# Altium PCB Smart_Gateway_Rev1.0.PcbDoc
Units mm, origin at the board's own origin, x right, y up, seen from the top; angles counter-clockwise.
Board outline 55 x 55 mm, 2 copper layers (Top Layer, Bottom Layer), stack 1.58 mm thick; 46 components, 48 nets, 224 pads, 110 vias.
Unrouted connection lines stored in the file: 43.
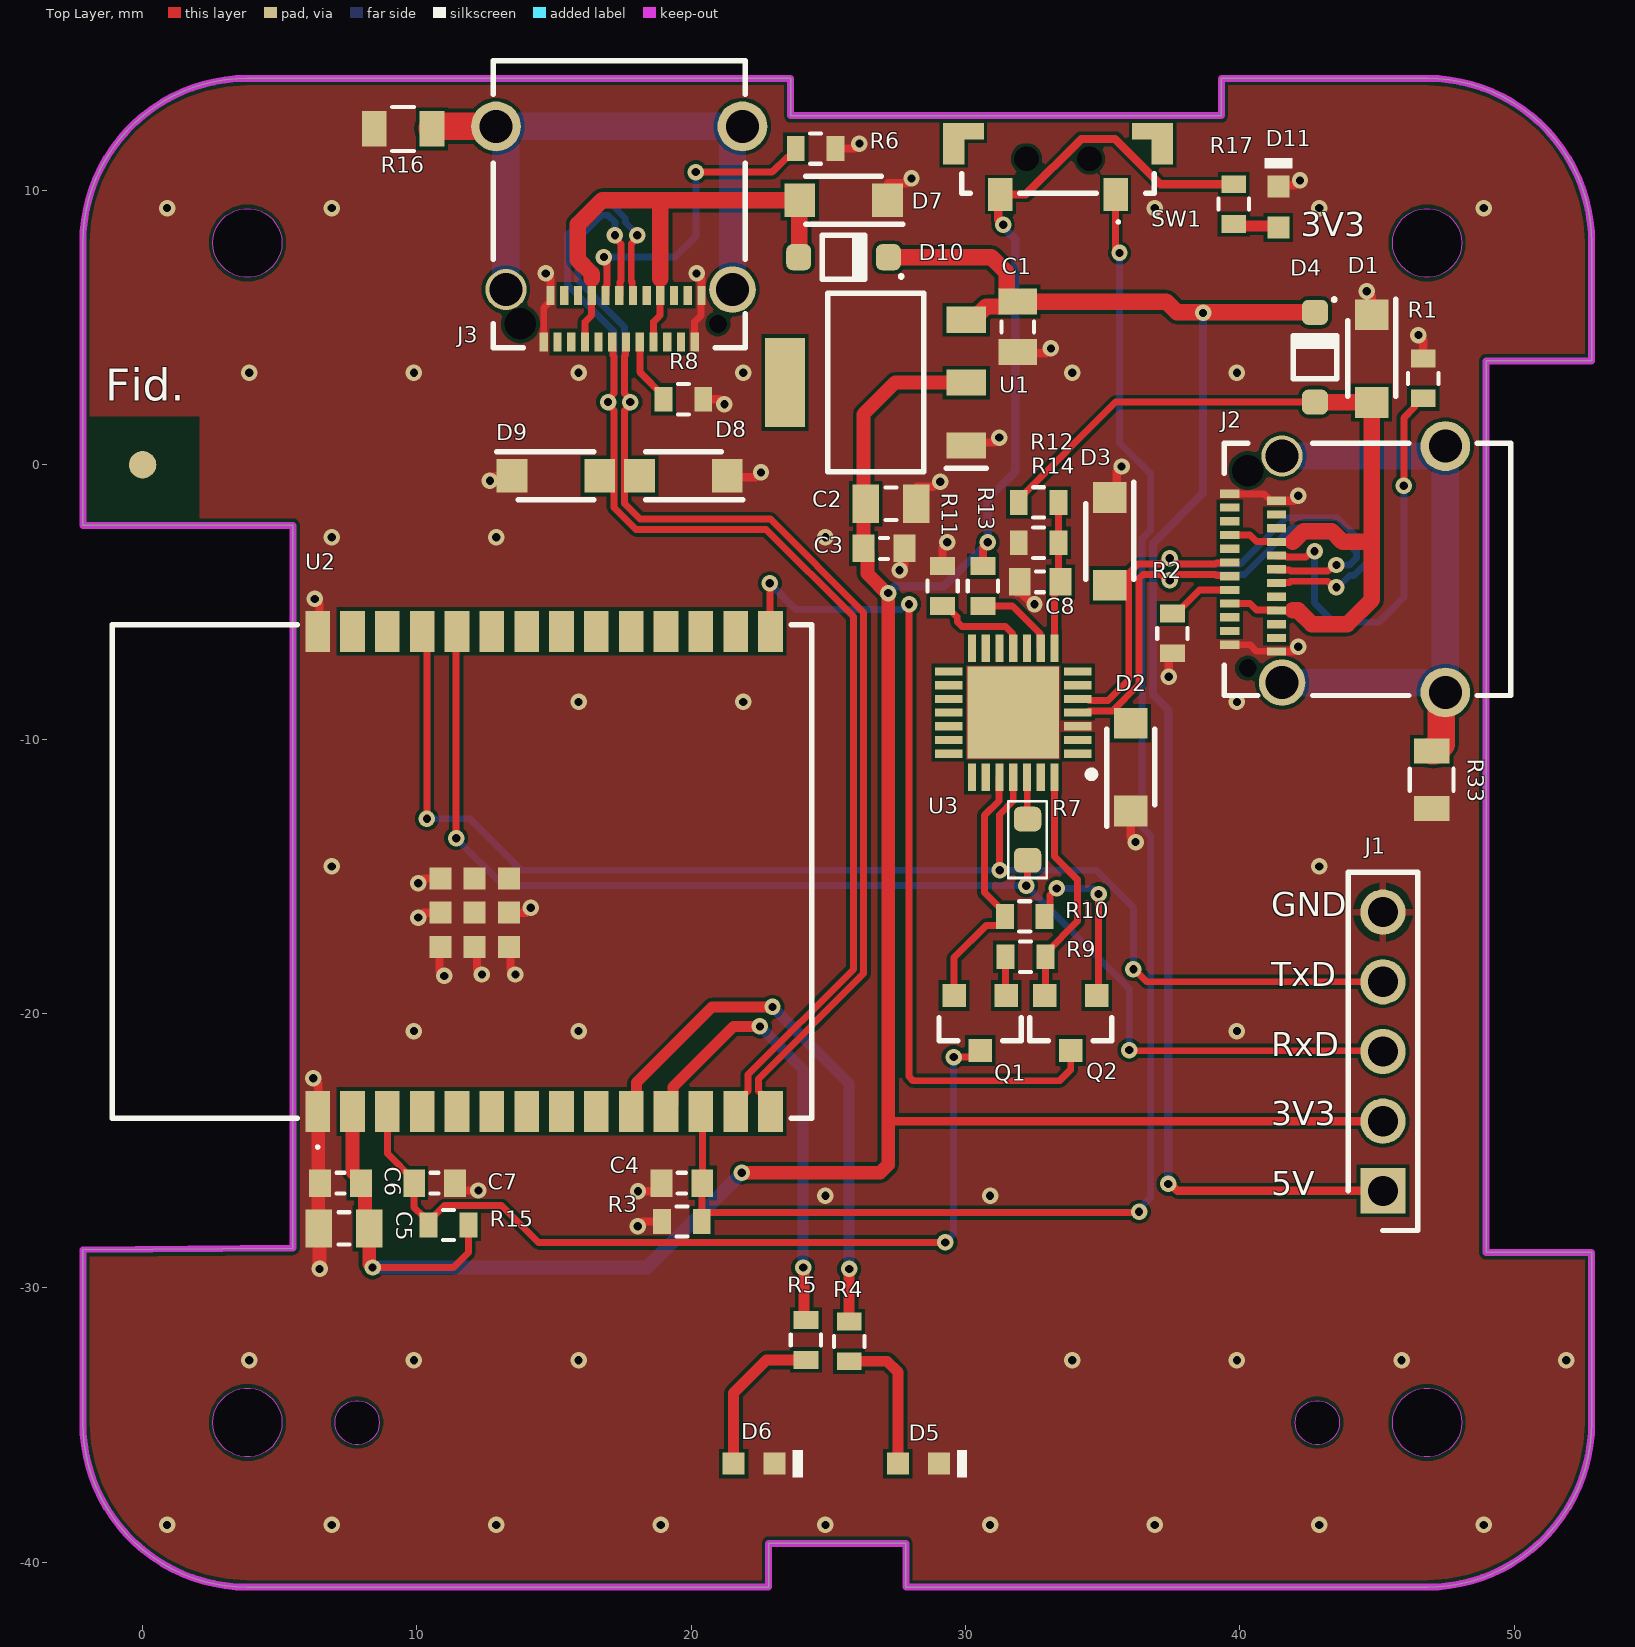
[diagram p0: Top Layer view]
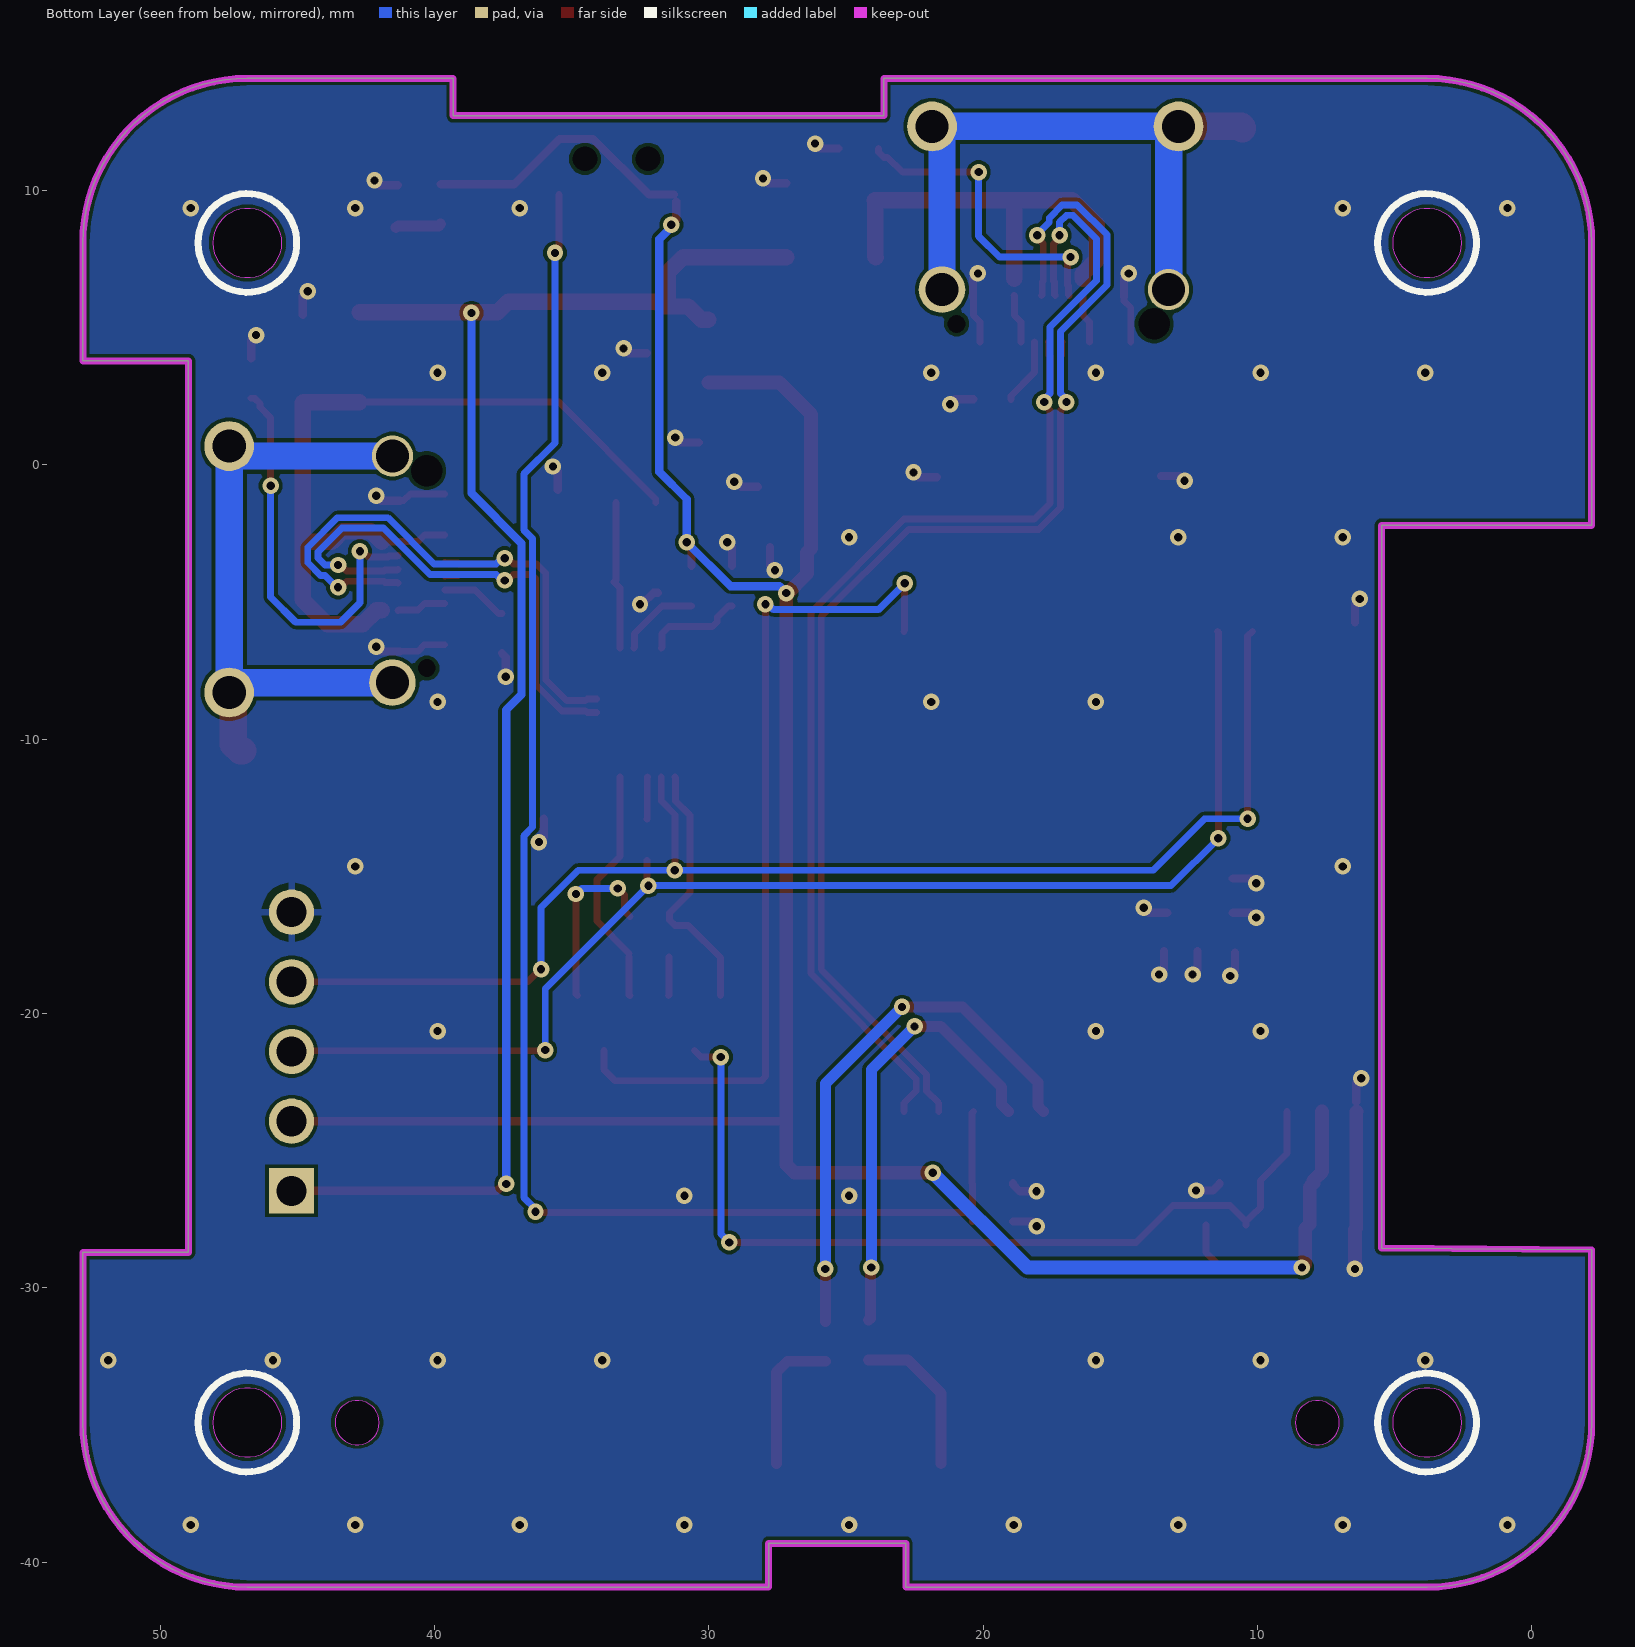
[diagram p1: Bottom Layer view, seen from below]
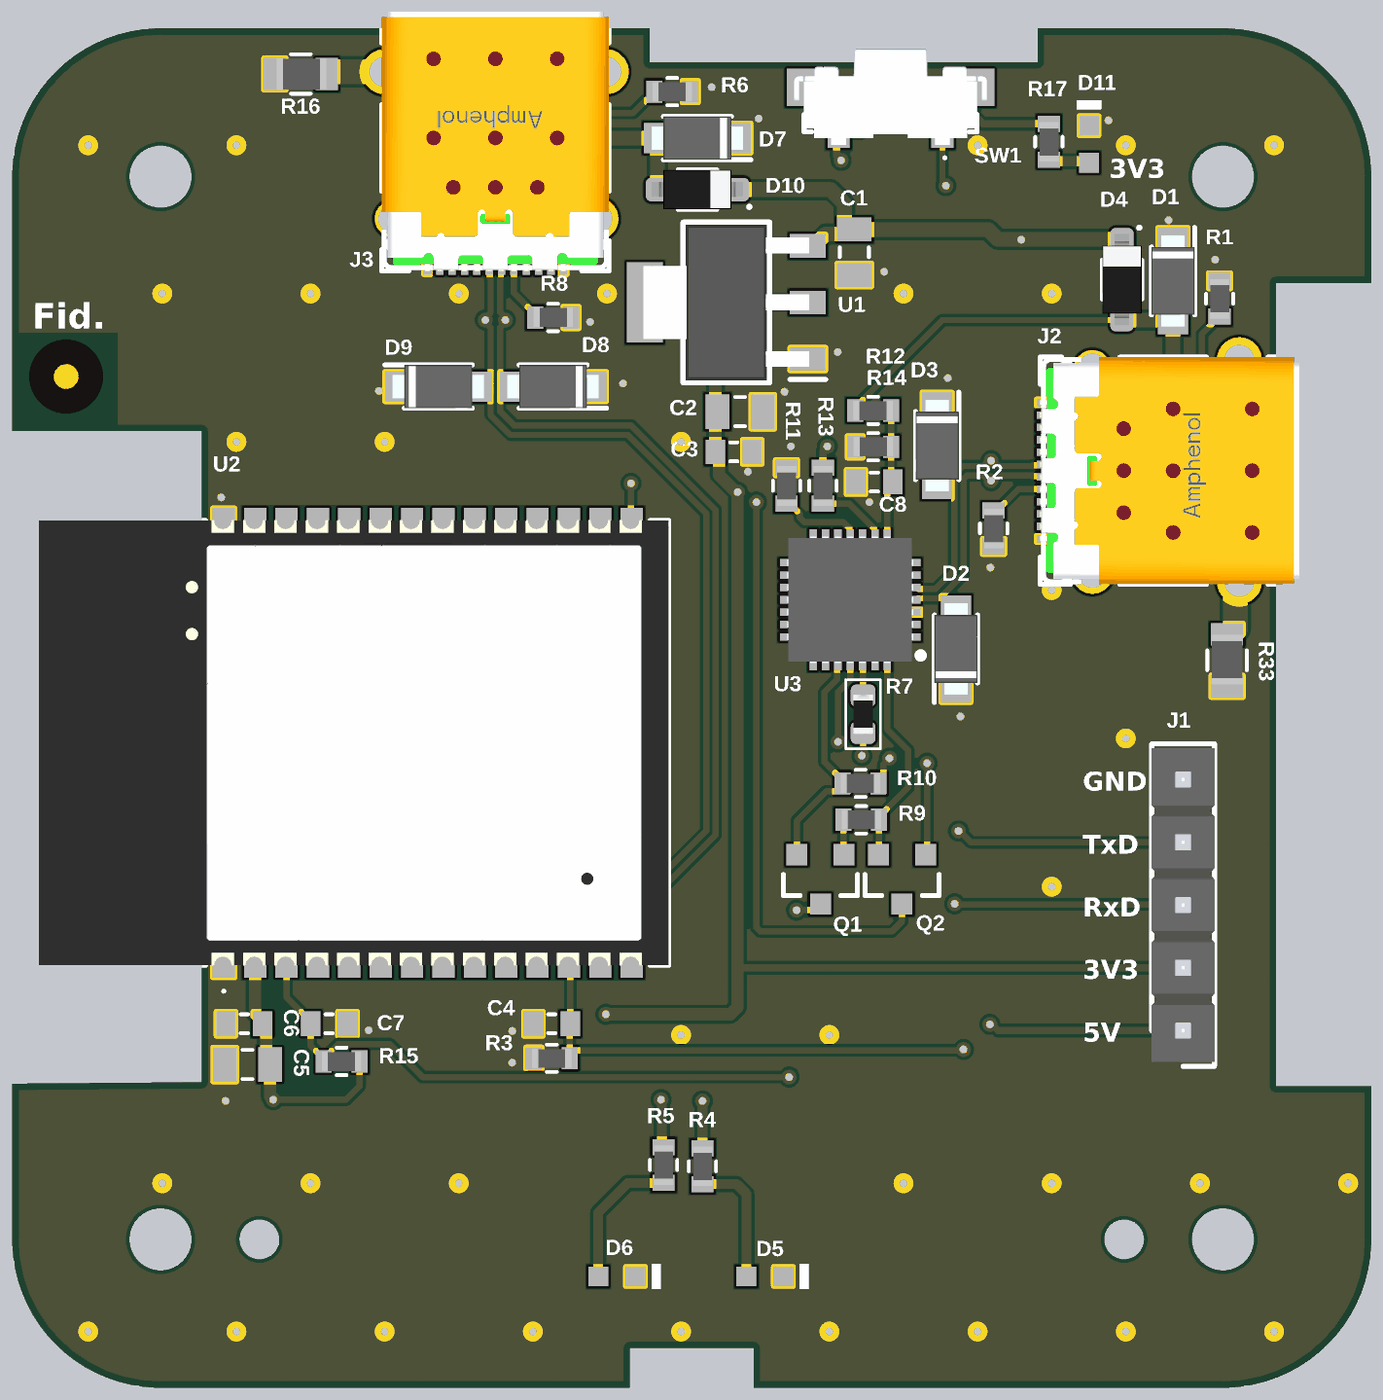
[diagram p2: 3D render of the assembled board from above, using the file's embedded part models]

## Layer stack, top to bottom
Top Solder: solder mask 0.0102, Solder Resist, Dk 3.5
Top Layer: signal copper 0.0356
Dielectric 1: dielectric 1.5086, FR-4, Dk 4.8
Bottom Layer: signal copper 0.0356
Bottom Solder: solder mask 0.0102, Solder Resist, Dk 3.5

## Board outline
3.822,-40.913 cw(c3.822,-34.913) -2.178,-34.913 -2.178,-28.613 5.482,-28.553 5.482,-2.213 -2.178,-2.213 -2.178,8.087 cw(c3.822,8.087) 3.822,14.087 23.622,14.087 23.622,12.725 39.322,12.725 39.322,14.087 46.822,14.087 cw(c46.822,8.087) 52.822,8.087 52.822,3.787 48.972,3.787 48.972,-28.713 52.822,-28.713 52.822,-34.913 cw(c46.822,-34.913) 46.822,-40.913 27.822,-40.913 27.822,-39.313 22.822,-39.313 22.822,-40.913
cut-out: 45.565,8.087 cw(c46.822,8.087) 48.079,8.087 cw(c46.822,8.087)
cut-out: 45.565,-34.913 cw(c46.822,-34.913) 48.079,-34.913 cw(c46.822,-34.913)
cut-out: 42.015,-34.913 cw(c42.822,-34.913) 43.629,-34.913 cw(c42.822,-34.913)
cut-out: 7.015,-34.913 cw(c7.822,-34.913) 8.629,-34.913 cw(c7.822,-34.913)
cut-out: 2.565,-34.913 cw(c3.822,-34.913) 5.079,-34.913 cw(c3.822,-34.913)
cut-out: 2.565,8.087 cw(c3.822,8.087) 5.079,8.087 cw(c3.822,8.087)

## Design rules (kind name [scope] priority, off if disabled: settings)
Clearance [All] p1: gap=0.127 ignorepadtopadclearanceinfootprint=TRUE
DiffPairsRouting DiffPairsRouting_USBB [InDifferentialPair('USBB_D')] p1: maxlimit=0.127 minlimit=0.127 mostfreqgap=0.127 toplayer_minwidth=0.25 toplayer_maxwidth=0.25 toplayer_prefwidth=0.25 bottomlayer_minwidth=0.25 bottomlayer_maxwidth=0.25 bottomlayer_prefwidth=0.25 impedanceprofiledriven=TRUE impedanceprofileid={7F7A424D-610C-4C87-8ACD-AF5C91837D9E} impedanceprofilevalue=100.000000 maxuncoupledlength=12.7
DiffPairsRouting DiffPairsRouting_USB [InDifferentialPair('USB_D')] p2: maxlimit=0.127 minlimit=0.127 mostfreqgap=0.127 toplayer_minwidth=0.25 toplayer_maxwidth=0.25 toplayer_prefwidth=0.25 bottomlayer_minwidth=0.25 bottomlayer_maxwidth=0.25 bottomlayer_prefwidth=0.25 impedanceprofiledriven=TRUE impedanceprofileid={7F7A424D-610C-4C87-8ACD-AF5C91837D9E} impedanceprofilevalue=100.000000 maxuncoupledlength=12.7
DiffPairsRouting [All] p3: maxlimit=0.254 minlimit=0.254 mostfreqgap=0.254 toplayer_minwidth=0.2 toplayer_maxwidth=0.6 toplayer_prefwidth=0.381 bottomlayer_minwidth=0.2 bottomlayer_maxwidth=0.6 bottomlayer_prefwidth=0.381 maxuncoupledlength=12.7
HoleToHoleClearance [All] p1: gap=0.127 allowstackedmicrovias=TRUE
MaxMinImpedance "Schematic Impedance Constraint_2" [InDifferentialPairClass('USBB')] p1: minimum=98.00 maximum=102.0
MinimumSolderMaskSliver [All] p1: minsoldermaskwidth=0
PolygonConnect [All] p1: thpad.connectstyle=Relief thpad.reliefconductorwidth=0.254 thpad.reliefentries=4 thpad.polygonreliefangle="90 Angle" thpad.airgapwidth=0.254 smdpad.connectstyle=Direct smdpad.reliefconductorwidth=0.254 smdpad.reliefentries=4 smdpad.polygonreliefangle="90 Angle" smdpad.airgapwidth=0.254 via.connectstyle=Direct via.reliefconductorwidth=0.254 via.reliefentries=4 via.polygonreliefangle="90 Angle" via.airgapwidth=0.254
RoutingVias [All] p1: holewidth=0.711 width=1.27 viastyle="Through Hole" minholewidth=0.711 minwidth=1.27 maxholewidth=0.711 maxwidth=1.27
SilkToSilkClearance [All] p1: silktosilkclearance=0.1
SilkToSolderMaskClearance [IsPad] p1: minsilkscreentomaskgap=0 clearancetoexposedcopper=TRUE
SolderMaskExpansion [All] p1: expansion=0.102 istentingtop=FALSE
SupplyNets "Schematic Supply Nets_6" [InNet('3V3')] p1: voltage=0.000
SupplyNets "Schematic Supply Nets_5" [InNet('EARTH')] p2: voltage=0.000
SupplyNets "Schematic Supply Nets_4" [InNet('GND')] p3: voltage=0.000
SupplyNets "Schematic Supply Nets_3" [InNet('5V')] p4: voltage=0.000
SupplyNets "Schematic Supply Nets_2" [InNet('EARTH2')] p5: voltage=0.000
SupplyNets "Schematic Supply Nets_1" [InNet('VBUSA')] p6: voltage=0.000
SupplyNets "Schematic Supply Nets" [InNet('VBUSB')] p7: voltage=0.000
Width [All] p1: maxlimit=3 minlimit=0.2 preferedwidth=0.254 minimp=50.000000 maximp=50.000000 favimp=50.000000
25 further rules are at their usual default settings.

## Classes and differential pairs
differential pair class USBB: USBB_D
differential pair class USBA: USB_D
differential pair USBB_D: +USBB_D_P -USBB_D_N
differential pair USB_D: +USB_D_P -USB_D_N

## Components (designator, comment, footprint, x,y, rotation, side; value= is the part's Value field where it differs from the comment)
C1 "CAP" CAP_0805 31.902,5.029 r0 top value=10uF
C2 "CAP" CAP_0805 27.28,-1.422 r90 top value=10uF
C3 "CAP" CAP_0603 27.026,-3.048 r90 top value=100nF
C4 "CAP" CAP_0603 19.66,-26.187 r270 top value=100nF
C5 "CAP" CAP_0805 7.341,-27.838 r270 top value=10uF
C6 "CAP" CAP_0603 7.214,-26.187 r270 top value=100nF
C7 "CL10A105KA8NNNC" CAP_0603 10.643,-26.187 r90 top value=1uF
C8 "CL10A105KA8NNNC" CAP_0603 32.715,-4.267 r270 top value=1uF
D1 "ATV02W5V0B-HF" SODFL3718X130N 44.802,3.869 r270 top
D2 "ATV02W5V0B-HF" SODFL3718X130N 36.017,-11.024 r90 top
D3 "ATV02W5V0B-HF" SODFL3718X130N 35.255,-2.794 r270 top
D4 "PMEG4010EGWJ" SOD-123 42.737,3.921 r270 top value="40V 1A"
D5 "PSC-1608U52GC-G4" LED_0603_GRN 28.282,-36.412 r180 top locked value=GREEN
D6 "PSC-1608U52GC-G4" LED_0603_GRN 22.292,-36.412 r180 top locked value=GREEN
D7 "ATV02W5V0B-HF" SODFL3718X130N 25.552,9.649 r180 top
D8 "ATV02W5V0B-HF" SODFL3718X130N 19.71,-0.406 r180 top
D9 "ATV02W5V0B-HF" SODFL3718X130N 15.062,-0.406 r0 top
D10 "PMEG4010EGWJ" SOD-123 25.552,7.566 r180 top value="40V 1A"
D11 "PSC-1608U52GC-G4" LED_0603_GRN 41.402,9.398 r270 top value=GREEN
J1 "M20-9990546" HDRV5W64P0X254_1X5_1270X254X864P 45.212,-26.467 r90 top
J2 "12401598E4#2A" 12401598E42A 44.653,-3.81 r90 top locked
J3 "12401598E4#2A" 12401598E42A 17.374,9.5 r180 top locked
Q1 "MMBT3904-7-F" SOT23 30.531,-20.349 r180 top value="40V 0.2A"
Q2 "MMBT3904-7-F" SOT23 33.833,-20.349 r180 top value="40V 0.2A"
R1 "RES" RES_0603 46.685,3.15 r180 top value=10K
R2 "RES" RES_0603 37.541,-6.147 r180 top value=10K
R3 "RES" RES_0603 19.66,-27.584 r90 top value=10K
R4 "0603SAF3301T5E" RES_0603 25.756,-31.953 r180 top value=3.3K
R5 "0603SAF3301T5E" RES_0603 24.181,-31.902 r180 top value=3.3K
R6 "RES" RES_0603 24.536,11.528 r90 top value=10K
R7 "0603SAJ0511T5E" R0603 32.258,-13.665 r270 top value=510R
R8 "RES" RES_0603 19.71,2.388 r270 top value=10K
R9 "RES" RES_0603 32.182,-17.936 r270 top value=10K
R10 "RES" RES_0603 32.156,-16.463 r90 top value=10K
R11 "RES" RES_0603 29.159,-4.42 r180 top value=10K
R12 "0603SAF2152T5E" RES_0603 32.664,-1.372 r90 top value=21.5K
R13 "RES" RES_0603 30.632,-4.42 r180 top value=1K
R14 "RES" RES_0603 32.664,-2.845 r270 top value=47K
R15 "RES" RES_0603 11.151,-27.711 r90 top value=10K
R16 "RES" RES_0805 9.5,12.243 r90 top value=2.2M
R17 "0603SAF3301T5E" RES_0603 39.776,9.5 r180 top value=3.3K
R33 "RES" RES_0805 46.99,-11.481 r180 top value=2.2M
SW1 "TS32-7-35-BK-B-260-RA-SMT-TR" TS32735BKB160RAHSMTTR 33.369,11.376 r0 top locked
U1 "AMS1117-3.3" SOT229P700X180-4N 26.721,2.997 r180 top
U2 "ESP32-C6-WROOM-1-N4" ESP32C6WROOM1N4 11.642,-14.822 r90 top locked
U3 "CP2102N-A01-GQFN28" QFN50P500X500X80-29N-D 31.737,-9.034 r180 top

## Footprints (in the part's own frame and the unit in brackets; to place one, negate y for a bottom-side part, rotate by r counter-clockwise, add the part's x,y. Pads: shape width x height; smd on the part's side, far side on the other; paste and mask are expansions set on the pad)
12401598E42A [mm]
  rect 0.3x0.7 smd: A1(-2.75,5.025) A2(-2.25,5.025) A3(-1.75,5.025) A4(-1.25,5.025) A5(-0.75,5.025) A6(-0.25,5.025) A7(0.25,5.025) A8(0.75,5.025) A9(1.25,5.025) A10(1.75,5.025) A11(2.25,5.025) A12(2.75,5.025) B1(2.5,3.325) B2(2,3.325) B3(1.5,3.325) B4(1,3.325) B5(0.5,3.325) B6(0,3.325) B7(-0.5,3.325) B8(-1,3.325) B9(-1.5,3.325) B10(-2,3.325) B11(-2.5,3.325) B12(-3,3.325)
  round 0 hole 0.65 unplated: MH1(-3.6,4.365)
  round 0 hole 1.15 unplated: MH2(3.6,4.365)
  round 1.7 hole 1.21: S1(-4.13,3.115)
  round 1.5 hole 1.21: S2(4.13,3.115)
  round 1.815 hole 1.21: S3(-4.49,-2.835) S4(4.49,-2.835)
  silkscreen extent -4.6,-5.23 4.6,5.23, body extent -4.6,-5.25 4.6,5.23, height 3.31
CAP_0603 [mm]
  rect 1x0.79 smd: 1(0,0.745) 2(0,-0.745)
  silkscreen extent -0.38,-0.15 0.38,0.15, body extent -0.4,-0.8 0.4,0.8, height 0.8
CAP_0805 [mm]
  rect 1.4x0.96 smd: 1(0,0.92) 2(0,-0.92)
  silkscreen extent -0.59,-0.2 0.59,0.2, body extent -0.62,-1 0.63,1, height 1
ESP32C6WROOM1N4 [mm]
  rect 1.5x0.9 smd: 1(-8.75,5.26) 2(-8.75,3.99) 3(-8.75,2.72) 4(-8.75,1.45) 5(-8.75,0.18) 6(-8.75,-1.09) 7(-8.75,-2.36) 8(-8.75,-3.63) 9(-8.75,-4.9) 10(-8.75,-6.17) 11(-8.75,-7.44) 12(-8.75,-8.71) 13(-8.75,-9.98) 14(-8.75,-11.25) 15(8.75,-11.25) 16(8.75,-9.98) 17(8.75,-8.71) 18(8.75,-7.44) 19(8.75,-6.17) 20(8.75,-4.9) 21(8.75,-3.63) 22(8.75,-2.36) 23(8.75,-1.09) 24(8.75,0.18) 25(8.75,1.45) 26(8.75,2.72) 27(8.75,3.99) 28(8.75,5.26)
  rect 0.8x0.8 smd: 29(-1.505,-0.46) 30(-1.505,0.79) 31(-2.755,0.79) 32(-2.755,-0.46) 33(-2.755,-1.71) 34(-1.505,-1.71) 35(-0.255,-1.71) 36(-0.255,-0.46) 37(-0.255,0.79)
  silkscreen extent -10.1,-12.75 9,12.75, body extent -9.01,-12.75 9.01,12.75, height 3.11
HDRV5W64P0X254_1X5_1270X254X864P [mm]
  rect 1.65x1.65 hole 1.1: 1(0,0)
  round 1.65 hole 1.1: 2(2.54,0) 3(5.08,0) 4(7.62,0) 5(10.16,0)
  silkscreen extent -1.45,-1.27 11.61,1.27, body extent -1.27,-1.27 11.43,1.27, height 8.64
LED_0603_GRN [mm]
  rect 0.8x0.8 smd: 1(-0.75,0) 2(0.75,0)
  silkscreen extent -1.78,-0.51 -1.4,0.51, body extent -0.79,-0.45 0.84,0.45, height 0.8
QFN50P500X500X80-29N-D [mm]
  rect 1x0.3 smd: 1(-2.35,1.5) 2(-2.35,1) 3(-2.35,0.5) 4(-2.35,0) 5(-2.35,-0.5) 6(-2.35,-1) 7(-2.35,-1.5) 15(2.35,-1.5) 16(2.35,-1) 17(2.35,-0.5) 18(2.35,0) 19(2.35,0.5) 20(2.35,1) 21(2.35,1.5)
  rect 0.3x1 smd: 8(-1.5,-2.35) 9(-1,-2.35) 10(-0.5,-2.35) 11(0,-2.35) 12(0.5,-2.35) 13(1,-2.35) 14(1.5,-2.35) 22(1.5,2.35) 23(1,2.35) 24(0.5,2.35) 25(0,2.35) 26(-0.5,2.35) 27(-1,2.35) 28(-1.5,2.35)
  rect 3.35x3.35 smd: 29(0,0)
  silkscreen extent -2.98,2.13 -2.73,2.37, body extent -2.55,-2.55 2.55,2.55, height 0.8
R0603 [mm]
  rrect50% 0.9x1 smd: 1(-0.75,0) 2(0.75,0)
  silkscreen extent -1.4,-0.7 1.4,0.7, body extent -0.8,-0.4 0.8,0.4, height 0.45
RES_0603 [mm]
  rect 0.9x0.65 smd: 1(0,0.725) 2(0,-0.725)
  silkscreen extent -0.55,-0.2 0.55,0.2, body extent -0.4,-0.79 0.39,0.81, height 0.5
RES_0805 [mm]
  rect 1.3x0.9 smd: 1(0,1.05) 2(0,-1.05)
  silkscreen extent -0.8,-0.4 0.8,0.4, body extent -0.64,-1.03 0.63,0.98, height 0.63
SOD-123 [mm] "SOD, 2-Leads, Body 2.69x1.6mm"
  rrect50% 0.91x0.95 smd: 1(-1.635,0) 2(1.635,0)
  silkscreen extent -2.1,-0.8 0.78,0.8, body extent -1.85,-0.8 1.85,0.8, height 1.27
SODFL3718X130N [mm]
  rect 1.12x1.22 smd: 1(-1.6,0) 2(1.6,0)
  silkscreen extent -2.16,-0.87 1.38,0.87, body extent -1.85,-0.87 1.85,0.87, height 1.3
SOT23 [mm]
  rect 0.85x0.85 smd: 1(-0.95,-1) 2(0.95,-1) 3(0,1)
  silkscreen extent -1.5,-0.19 1.5,0.65, body extent -1.45,-0.65 1.45,0.65, height 1.17
SOT229P700X180-4N [mm]
  rect 1.45x0.95 smd: 1(-3.3,2.29) 2(-3.3,0) 3(-3.3,-2.29)
  rect 1.45x3.25 smd: 4(3.3,0)
  silkscreen extent -4.03,-3.25 1.75,3.25, body extent -3.35,-3.15 3.35,3.15, height 1.8
TS32735BKB160RAHSMTTR [mm]
  rect 0.9x1.2 smd: 1(2.1,-1.525) 2(-2.1,-1.525)
  rect 0.8x1.5 smd: 3(3.8,0.325) 4(-3.8,0.325)
  rect 0.7x0.6 smd: 5(-3.05,0.775) 6(3.05,0.775)
  round 0.45 hole 0.9 unplated: 7(1.15,-0.225) 8(-1.15,-0.225)
  silkscreen extent -3.5,-2.57 3.5,-0.77, body extent -3.9,-2 3.9,1.87, height 3.52

## Part data
C1 C2 C5: library part C01758, "CAP CER 10UF 16VDC %10 X5R SMD", Manufacturer=Samsung, Manufacturer Part Number=CL21A106KOQNNNE, Voltage=16V
C3 C4 C6: library part C01763, "CAP CER 100nF 50VDC %10 X7R SMD", Manufacturer=Samsung, Manufacturer Part Number=CL10B104KB8NNNL, Voltage=50V
C7 C8: library part C01757, "CAP CER 1UF 25VDC %10 X5R SMD", Manufacturer=Samsung, Voltage=25V, Manufacturer Part Number=CL10A105KA8NNNC
D1 D2 D3 D7 D8 D9: "TVS Diode (Bi-directional)", Manufacturer_Name="Comchip Technology", Mouser Part Number=750-ATV02W5V0B-HF, Datasheet Link=https://www.mouser.com/datasheet/2/80/ATV02W-HF_series_RevC-1480797.pdf, Height=1.3mm, Manufacturer_Part_Number=ATV02W5V0B-HF, Mouser Price/Stock=https://www.mouser.co.uk/ProductDetail/Comchip-Technology/ATV02W5V0B-HF?qs=vdiGlTBG6JtbR3aZU%2F7xAQ%3D%3D
D4 D10: "DIODE SCHOTTKY 40V 1A SOD123", Manufacturer="Nexperia USA Inc.", Package=SOD123, Supplier Part Number 1=1727-7336-2-ND, Manufacturer Part Number=PMEG4010EGWJ, Supplier 1=DIGIKEY, Supplier 2=MOUSER, Supplier 3=OZDISAN, Supplier Part Number 2=841-PMEG4010EGWJ, Supplier Part Number 3=1N5819HW-7-F
D5 D6 D11: library part LTST-C190TGKT, "LED GREEN WATER CLEAR 0603 SMD", Manufacturer=HONGLITRONIC, Package="0603(1608 Metric)", Manufacturer Part Number=PSC-1608U52GC-G4
J1: "Connector", Manufacturer_Name=Harwin, Mouser Part Number=855-M20-9990546, Datasheet Link=https://content.harwin.com/m/0df15f6e0f9f48e2/original/DRG-00479-Technical-Drawing-Datasheet-M20-999-pdf.pdf, Height=8.64mm, Manufacturer_Part_Number=M20-9990546, Mouser Price/Stock=https://www.mouser.co.uk/ProductDetail/Harwin/M20-9990546?qs=ulE8k0yEMYY8EKyDN9ic6A%3D%3D
J2 J3: "Connector", Manufacturer_Name=Amphenol, Mouser Part Number=523-12401598E4#2A, Arrow Part Number=12401598E4#2A, Arrow Price/Stock=https://www.arrow.com/en/products/12401598e42a/amphenol-fci?utm_currency=USD&region=nac, Datasheet Link=www.bf-regelungstechnik.de, Height=3.43mm, Manufacturer_Part_Number=12401598E4#2A, Mouser Price/Stock=https://www.mouser.co.uk/ProductDetail/Amphenol-Commercial-Products/12401598E42A?qs=367PjNmvCmllVMBVyIyS3w%3D%3D
Q1 Q2: "TRANSISTOR NPN 40V 0.2A SOT23-3", Manufacturer="Diodes Incorporated", Package=SOT23, Supplier Part Number 1=MMBT3904-FDITR-ND, Manufacturer Part Number=MMBT3904-7-F, Supplier 1=DIGIKEY, Supplier 2=MOUSER, Supplier 3=OZDISAN, Supplier Part Number 2=621-MMBT3904-F, Supplier Part Number 3=MMBT3904LT1G
R1 R2 R3 R6 R8 R9 R10 R11 R15: library part R02995, "RES 0603 10k Ohms %1 1/10W 100PPM", Manufacturer=ROYALOHM, Manufacturer Part Number=0603SAF1002T5E
R4 R5 R17: "RES.(1608) 0603 3.3K Ohms 1% 1/10W 100PPM SMT", Manufacturer=YAGEO, Manufacturer Part Number=RC0603FR-073K74L, Package="0603 (1608 Metric)"
R7: library part R03005, "RES.(1608) 0603 510 Ohms 5% 1/10W-S 100PPM", Manufacturer=ROYALOHM, Manufacturer Part Number=0603SAJ0511T5E
R12: library part R03011, "RES.(1608) 0603 21.5K Ohms 1% 1/10W-S 100PPM", Manufacturer=ROYALOHM, Manufacturer Part Number=0603SAF2152T5E
R13: library part R02998, "RES 0603 1K Ohms 1% 1/10W-S 100PPM", Manufacturer=ROYALOHM, Manufacturer Part Number=0603SAF1001T5E
R14: library part R03000, "RES 0603 47K Ohms 1% 1/10W-S 100PPM", Manufacturer=ROYALOHM, Manufacturer Part Number=0603SAF4702T5E
R16 R33: library part R01913, "RES SMD 2.2M OHM 1% 1/8W 0805", Manufacturer=Yageo, Manufacturer Part Number=RC0805FR-072M2L
SW1: "Switch", Manufacturer_Name="Same Sky", Mouser Part Number=179-TS32735B260RASMT, Datasheet Link=https://www.sameskydevices.com/product/resource/ts32.pdf, Height=3.7mm, Manufacturer_Part_Number=TS32-7-35-BK-B-260-RA-SMT-TR, Mouser Price/Stock=https://www.mouser.co.uk/ProductDetail/Same-Sky/TS32-7-35-BK-B-260-RA-SMT-TR?qs=efUn273yAhd1rev%2FGN0tPg%3D%3D
U1: "Integrated Circuit", Manufacturer_Name=Advanced, Datasheet Link=https://datasheet.datasheetarchive.com/originals/distributors/Datasheets-28/DSA-550594.pdf, Height=1.8mm, Manufacturer_Part_Number=AMS1117-3.3
U2: "Integrated Circuit", Manufacturer_Name="Espressif Systems", Mouser Part Number=356-ESP32C6WROOM1N4, Datasheet Link=https://www.espressif.com/sites/default/files/documentation/esp32-c6-wroom-1_wroom-1u_datasheet_en.pdf, Height=3.25mm, Manufacturer_Part_Number=ESP32-C6-WROOM-1-N4, Mouser Price/Stock=https://www.mouser.co.uk/ProductDetail/Espressif-Systems/ESP32-C6-WROOM-1-N4?qs=8Wlm6%252BaMh8R1JRAtXlt87w%3D%3D
U3: "Integrated Circuit", Manufacturer_Name="Silicon Labs", Mouser Part Number=634-CP2102NA01GQFN28, Arrow Part Number=CP2102N-A01-GQFN28, Arrow Price/Stock=https://www.arrow.com/en/products/cp2102n-a01-gqfn28/silicon-labs, Datasheet Link=http://www.farnell.com/datasheets/2245279.pdf, Height=0.8mm, Manufacturer_Part_Number=CP2102N-A01-GQFN28, Mouser Price/Stock=https://www.mouser.co.uk/ProductDetail/Silicon-Labs/CP2102N-A01-GQFN28?qs=%252BaFUgn%2FzHmxGRIXZFn%252Btdg%3D%3D

## Free pads (board coordinates)
  round 1 smd paste-5 mask+1: 4(0,0)

## Via types
v1: diameter 0.6, hole 0.3, Top Layer to Bottom Layer, tented both sides, 70 vias
v2: diameter 0.6, hole 0.3, Top Layer to Bottom Layer, 40 vias

## Nets (pads, with @x,y where several pads share a name; then routed paths per layer and width w, separated by ;. In a path a pad name is that pad's centre, name@x,y a point inside that pad or via, vN(x,y) a via of type N, cw(c..) or ccw(c..) an arc to the next point about the centre after c; other vN are vias at no path point)
3V3: C2.1 C3.1 C5.1 C6.1 J1.2 R13.2 R15.2 R17.2 SW1.2 U1.2 U2.2 | length 109.5
  Top Layer w0.254: v1(8.382,-29.261) 11.328,-29.261 11.876,-28.714 R15.2
  Top Layer w0.3: 27.178,-23.876 27.229,-23.927 J1.2 ; R13.2@30.63,-3.682 30.63,-3.004 v1(30.808,-2.826) ; SW1.2@31.191,9.601 31.191,8.924 v1(31.369,8.746) ; SW1.2 32.19,9.851 34.217,11.878 35.45,11.878 37.103,10.225 R17.2
  Top Layer w0.5: U2.2 7.652,-25.775 7.959,-26.082 C6.1 8.104,-26.332 8.104,-27.681 C5.1 8.261,-29.139 v1(8.382,-29.261) ; v1(21.844,-25.806) 26.885,-25.806 27.178,-25.514 27.178,-23.876 27.178,-4.724 26.426,-3.972 26.426,-3.193 C3.1 26.281,1.846 27.432,2.997 U1.2
  Bottom Layer w0.3: v1(27.178,-4.676) 27.429,-4.425 29.209,-4.425 v1(30.808,-2.826) 30.808,-1.257 31.806,-0.259 31.806,8.227 31.369,8.665 v1(31.369,8.746)
  Bottom Layer w0.5: v1(8.382,-29.261) 18.39,-29.261 v1(21.844,-25.806)
5V: C1.1 D4.1 D10.1 J1.1 U1.3 | length 59.5
  Top Layer w0.3: v1(37.389,-26.213) 37.47,-26.213 37.724,-26.467 J1.1
  Top Layer w0.6: D10.1 30.941,7.566 31.502,7.004 31.502,6.129 31.682,5.949 37.313,5.949 37.706,5.556 D4.1 ; U1.3 30.271,5.287 30.753,5.769 C1.1@31.722,5.769
  Bottom Layer w0.3: v1(37.389,-26.213) 37.389,-8.941 36.83,-8.382 36.83,-2.863 38.659,-1.034 v1(38.659,5.537)
CHIP_PU: C7.1 Q1.3 R15.1 U2.3 | length 32.3
  Top Layer w0.254: U2.3 8.922,-25.106 9.898,-26.082 C7.1 9.898,-27.068 10.218,-27.388 10.228,-27.388 R15.1@10.426,-27.586 ; R15.1 R15.1@10.426,-27.586 ; v1(29.261,-28.346) 14.427,-28.346 13.088,-27.007 11.005,-27.007 R15.1@10.426,-27.586 ; v1(29.566,-21.59) 30.29,-21.59 Q1.3
  Bottom Layer w0.254: v1(29.261,-28.346) 29.566,-28.042 v1(29.566,-21.59)
DTR: Q2.2 R9.1 U3.28 | length 8.7
  Top Layer w0.254: Q2.2 32.907,-19.325 R9.1 ; R9.1@32.907,-17.811 34.087,-16.631 34.087,-15.126 33.237,-14.276 U3.28
EARTH: J2.S1 J2.S2 J2.S3 J2.S4 R33.2 | length 23.6
  Top Layer w1: R33.2 47.09,-10.431 47.332,-10.189 47.332,-8.456 J2.S3
  Bottom Layer w1: J2.S1 46.908,-7.94 47.268,-8.3 J2.S3 J2.S4 47.268,0.68 46.908,0.32 J2.S2
EARTH2: J3.S1 J3.S2 J3.S3 J3.S4 R16.2 | length 23.6
  Top Layer w1: R16.2 10.55,12.285 10.6,12.335 J3.S4
  Bottom Layer w1: J3.S2 13.244,11.754 12.884,12.114 J3.S4 J3.S3 21.864,12.114 21.504,11.754 J3.S1
GND: C1.2 C2.2 C3.2 C4.2 C5.2 C6.2 C7.2 C8.2 D1.1 D2.1 D3.1 D5.1 D6.1 D7.1 D8.1 D9.1 D11.1 J1.5 J2.A1 J2.A12 J2.B1 J2.B12 J3.A1 J3.A12 J3.B1 J3.B12 R1.2 R2.1 R3.1 R6.2 R8.1 R11.2 R14.2 R16.1 R33.1 U1.1 U2.1 U2.28 U2.29 U2.30 U2.31 U2.32 U2.33 U2.34 U2.35 U2.36 U2.37 U3.3 U3.29 | length 42.7
  Top Layer w0.25: J3.A12 14.624,5.725 14.874,5.975 J3.B1 ; J3.A1 20.124,5.212 20.362,5.45 20.362,6.163 J3.B12 ; J2.A1 40.366,-6.56 40.604,-6.798 41.316,-6.798 J2.B12 ; J2.A12 40.878,-1.06 41.128,-1.31 J2.B1
  Top Layer w0.3: v1(6.223,-22.365) 6.401,-22.542 U2.1@6.401,-23.22 ; v1(6.274,-4.889) 6.452,-5.067 U2.28@6.452,-5.745 ; v1(10.051,-16.505) 10.229,-16.327 U2.30@10.907,-16.327 ; v1(10.051,-15.255) 10.229,-15.077 U2.37@10.907,-15.077 ; U2.31@10.82,-17.776 10.82,-18.453 v1(10.998,-18.631) ; C7.2 11.388,-26.208 11.633,-26.453 v1(12.243,-26.453) ; U2.32@12.192,-17.725 12.192,-18.402 v1(12.37,-18.58) ; v1(12.662,-0.584) 12.84,-0.406 D9.1@13.517,-0.406 ; U2.34@13.297,-16.327 13.974,-16.327 v1(14.152,-16.15) ; U2.33@13.411,-17.725 13.411,-18.402 v1(13.589,-18.58) ; v1(14.696,6.975) 14.874,6.797 J3.B1@14.874,6.12 ; v1(18.052,-27.76) 18.23,-27.582 R3.1@18.907,-27.582 ; v1(18.059,-26.483) 18.67,-26.483 18.915,-26.238 C4.2 ; v1(20.196,6.975) 20.374,6.797 J3.B12@20.374,6.12 ; R8.1@20.353,2.388 21.031,2.388 v1(21.208,2.21) ; D8.1@21.687,-0.457 22.365,-0.457 v1(22.543,-0.279) ; R6.2@25.274,11.53 25.952,11.53 v1(26.13,11.708) ; 27.174,10.262 27.851,10.262 v1(28.029,10.439) ; v1(27.593,-3.848) 27.771,-3.67 C3.2@27.771,-2.993 ; C2.2@28.223,-0.797 28.82,-0.797 28.998,-0.62 v1(29.079,-0.62) ; R11.2@29.157,-3.682 29.157,-3.004 v1(29.335,-2.826) ; U1.1@30.374,0.813 31.052,0.813 v1(31.229,0.991) ; C8.2@31.86,-4.667 32.018,-4.667 32.431,-5.08 v1(32.512,-5.08) ; C1.2@32.254,4.064 32.931,4.064 v1(33.109,4.242) ; D3.1@35.509,-0.919 35.509,-0.241 v1(35.687,-0.063) ; D2.1@36.017,-12.899 36.017,-13.576 v1(36.195,-13.754) ; v1(37.407,-7.727) 37.407,-7.006 R2.1 ; J2.B12@41.273,-6.81 41.951,-6.81 v1(42.128,-6.632) ; J2.B1@41.273,-1.31 41.951,-1.31 v1(42.128,-1.132) ; D11.1@41.334,10.185 42.012,10.185 v1(42.189,10.363) ; v1(44.624,6.324) 44.802,6.146 D1.1 ; v1(46.507,4.73) 46.685,4.552 R1.2
  Top Layer w0.5: U2.1 6.401,-23.592 6.401,-27.819 C5.2 6.452,-27.869 v1(6.452,-29.312)
  other v2: 0.892,-38.642 6.892,-38.642 12.892,-38.642 18.892,-38.642 24.892,-38.642 30.892,-38.642 36.892,-38.642 42.892,-38.642 48.892,-38.642 3.892,-32.642 9.892,-32.642 15.892,-32.642 33.892,-32.642 39.892,-32.642 45.892,-32.642 51.892,-32.642 24.892,-26.642 30.892,-26.642 9.892,-20.642 15.892,-20.642 39.892,-20.642 6.892,-14.642 42.892,-14.642 15.892,-8.642 21.892,-8.642 39.892,-8.642 6.892,-2.642 12.892,-2.642 24.892,-2.642 3.892,3.358 9.892,3.358 15.892,3.358 21.892,3.358 33.892,3.358 39.892,3.358 0.892,9.358 6.892,9.358 36.892,9.358 42.892,9.358 48.892,9.358
GPIO0: U2.8
GPIO1: U2.9
GPIO2: U2.27
GPIO3: U2.26
GPIO4: U2.4
GPIO5: U2.5
GPIO6: U2.6
GPIO7: U2.7
GPIO8: R4.2 U2.10 | length 19.9
  Top Layer w0.4: U2.10 18.006,-23.378 18.006,-22.518 20.763,-19.761 v1(22.962,-19.761) ; R4.2 v1(25.756,-29.312)
  Bottom Layer w0.4: v1(22.962,-19.761) 25.756,-22.555 v1(25.756,-29.312)
GPIO9: Q2.3 U2.15 | length 31.4
  Top Layer w0.254: v1(22.864,-4.322) 22.864,-6.045 U2.15 ; v1(27.94,-5.08) 27.94,-22.305 28.089,-22.454 33.426,-22.454 33.833,-22.047 Q2.3
  Bottom Layer w0.254: v1@22.86,-4.318 23.825,-5.283 27.643,-5.283 27.846,-5.08 v1(27.94,-5.08)
GPIO10: R5.2 U2.11 | length 16.5
  Top Layer w0.4: U2.11 19.332,-23.322 19.332,-22.68 21.539,-20.472 v1(22.504,-20.472) ; v1(24.079,-29.261) 24.117,-29.299 24.117,-31.114 R5.2
  Bottom Layer w0.4: v1(22.504,-20.472) 24.079,-22.047 v1(24.079,-29.261)
GPIO11: C4.1 R3.2 SW1.1 U2.12 | length 58.1
  Top Layer w0.254: U2.12 20.405,-23.625 C4.1 20.385,-26.207 R3.2 ; R3.2@20.385,-27.459 20.583,-27.261 36.289,-27.261 v1(36.322,-27.229) ; SW1.1 35.469,7.864 v1(35.611,7.722)
  Bottom Layer w0.254: v1(35.611,7.722) 35.611,0.796 36.749,-0.342 36.749,-2.373 36.426,-2.696 36.426,-13.202 36.749,-13.525 36.749,-26.708 36.322,-27.135 v1(36.322,-27.229)
GPIO15: U2.23
GPIO18: U2.16
GPIO19: U2.17
GPIO20: U2.18
GPIO21: U2.19
GPIO22: U2.20
GPIO23: U2.21
NetC8_1: C8.1 R12.2 R14.1 U3.8 | length 5.4
  Top Layer w0.25: U3.8 33.237,-4.491 C8.1 33.389,-4.196 R12.2
NetD5_2: D5.2 R4.1 | length 5.3
  Top Layer w0.4: R4.1 27.141,-32.678 27.532,-33.069 D5.2
NetD6_2: D6.2 R5.1 | length 5.7
  Top Layer w0.4: D6.2 21.539,-36.41 21.539,-33.833 22.745,-32.627 R5.1
NetD11_2: D11.2 R17.1 | length 1.7
  Top Layer w0.4: R17.1 39.84,8.711 41.339,8.711 D11.2
NetJ2_A5: J2.A5 R2.2 | length 2.4
  Top Layer w0.254: R2.2 37.666,-5.422 38.528,-4.56 J2.A5
NetJ2_B5: J2.B5 R1.1 | length 14.9
  Top Layer w0.254: J2.B5 41.351,-3.333 41.666,-3.333 41.7,-3.367 42.412,-3.367 42.629,-3.15 v1(42.723,-3.15) ; v1(45.974,-0.762) 45.974,1.713 46.362,2.102 46.362,2.227 46.56,2.425 R1.1
  Bottom Layer w0.254: v1(42.723,-3.15) 42.723,-5.029 43.434,-5.74 45.06,-5.74 45.974,-4.826 v1(45.974,-0.762)
NetJ3_A5: J3.A5 R8.2 | length 2.4
  Top Layer w0.254: J3.A5 18.124,3.374 18.985,2.513 R8.2
NetJ3_B5: J3.B5 R6.1 | length 11.5
  Top Layer w0.254: v1(16.815,7.569) 16.815,7.476 16.931,7.359 16.931,6.545 16.897,6.51 16.897,6.198 J3.B5 ; v1(20.168,10.668) 22.951,10.668 23.488,11.205 23.613,11.205 23.811,11.403 R6.1
  Bottom Layer w0.254: v1(16.815,7.569) 19.406,7.569 20.168,8.331 v1(20.168,10.668)
NetQ1_1: Q1.1 R9.2 | length 1.4
  Top Layer w0.254: R9.2 31.457,-19.325 Q1.1
NetQ2_1: Q2.1 R10.2 | length 6.5
  Top Layer w0.254: R10.2 33.079,-16.265 33.079,-15.689 v1(33.325,-15.443) ; Q2.1 34.849,-19.283 v1(34.849,-15.646)
  Bottom Layer w0.254: v1(33.325,-15.443) 34.646,-15.443 v1(34.849,-15.646)
NetR7_1: R7.1 U3.26 | length 1.5
  Top Layer w0.25: U3.26 32.247,-11.395 32.247,-12.905 R7.1
NetR11_1: R11.1 U3.11 | length 3.6
  Top Layer w0.25: R11.1 29.284,-5.145 29.694,-5.554 29.694,-5.716 29.87,-5.893 31.451,-5.893 31.712,-6.153 31.712,-6.659 U3.11
NetR13_1: R13.1 U3.9 | length 3
  Top Layer w0.25: R13.1 31.703,-5.145 32.712,-6.153 32.712,-6.659 U3.9
RTS: Q1.2 R10.1 U3.24 | length 9.5
  Top Layer w0.254: Q1.2 29.581,-17.968 30.763,-16.786 31.233,-16.786 31.431,-16.588 R10.1 31.431,-16.338 30.688,-15.594 30.688,-12.775 31.214,-12.249 31.214,-11.407 U3.24
UART_RxD: J1.3 R7.2 U2.24 | length 46.8
  Top Layer w0.25: v1(11.43,-13.614) 11.43,-6.104 U2.24 ; v1(32.207,-15.342) 32.258,-15.291 R7.2 ; v1(35.966,-21.336) 35.992,-21.361 45.187,-21.361 J1.3
  Bottom Layer w0.25: v1(11.43,-13.614) 13.157,-15.342 v1(32.207,-15.342) 35.966,-19.101 v1(35.966,-21.336)
UART_TxD: J1.4 U2.25 U3.25 | length 49.1
  Top Layer w0.25: U2.25 10.363,-6.244 v1(10.363,-12.903) ; v1(31.242,-14.783) 31.242,-12.757 31.737,-12.262 U3.25 ; v1(36.119,-18.39) 36.158,-18.39 36.615,-18.847 J1.4
  Bottom Layer w0.25: v1(10.363,-12.903) 11.938,-12.903 13.818,-14.783 v1(31.242,-14.783) 34.766,-14.783 36.119,-16.136 v1(36.119,-18.39)
USB_D_N: D3.2 J2.A7 J2.B7 U3.5 | length 22.8
  Top Layer w0.25: U3.5 34.437,-8.534 34.498,-8.596 35.194,-8.596 35.945,-7.844 35.945,-3.959 36.282,-3.622 37.127,-3.622 37.345,-3.404 v1(37.44,-3.404) 37.534,-3.404 37.752,-3.622 39.107,-3.622 39.144,-3.585 39.603,-3.585 J2.A7 ; J2.B7 41.353,-4.285 41.813,-4.285 41.849,-4.248 43.204,-4.248 v1@43.422,-4.466
  Bottom Layer w0.25: v1(37.44,-3.404) 37.534,-3.404 37.752,-3.622 40.016,-3.622 41.707,-1.93 43.539,-1.93 44.623,-3.015 44.623,-3.56 44.153,-4.03 43.997,-4.03 43.561,-4.466 v1(43.517,-4.466)
USB_D_P: D2.2 J2.A6 J2.B6 U3.4 | length 21.3
  Top Layer w0.25: U3.4 34.437,-9.034 34.498,-8.973 35.35,-8.973 36.322,-8 36.322,-4.145 36.468,-3.998 37.127,-3.998 37.345,-4.216 v1(37.44,-4.216) 37.534,-4.216 37.752,-3.998 39.107,-3.998 39.144,-4.035 39.603,-4.035 J2.A6 ; J2.B6 41.353,-3.835 41.813,-3.835 41.849,-3.872 43.204,-3.872 v1@43.422,-3.654
  Bottom Layer w0.25: v1(37.44,-4.216) 37.534,-4.216 37.752,-3.998 40.172,-3.998 41.863,-2.307 43.383,-2.307 44.247,-3.171 44.247,-3.404 43.997,-3.654 v1(43.517,-3.654)
USBB_D_N: D9.2 J3.A7 J3.B7 U2.13 | length 49.1
  Top Layer w0.25: J3.A7 17.149,4.449 17.149,3.99 17.185,3.954 17.185,2.599 16.967,2.381 v1(16.967,2.286) 16.967,2.191 17.185,1.973 17.185,-0.243 17.185,-1.564 17.98,-2.358 22.729,-2.358 25.908,-5.537 25.908,-18.39 22.068,-22.229 22.068,-22.826 21.622,-23.272 U2.13 ; J3.B7 17.848,6.2 17.848,6.659 17.812,6.696 17.812,8.05 v1@18.03,8.268
  Bottom Layer w0.25: v1(16.967,2.286) 16.967,2.381 17.185,2.599 17.185,4.862 15.494,6.553 15.494,8.386 16.578,9.47 17.123,9.47 17.594,8.999 17.594,8.843 18.03,8.407 v1(18.03,8.363)
USBB_D_P: D8.2 J3.A6 J3.B6 U2.14 | length 47.7
  Top Layer w0.25: v1@17.217,8.268 17.435,8.05 17.435,6.696 17.399,6.659 17.399,6.2 J3.B6 ; J3.A6 17.598,4.449 17.598,3.99 17.562,3.954 17.562,2.599 17.78,2.381 v1(17.78,2.286) 17.78,2.191 17.562,1.973 17.562,-1.408 18.136,-1.981 22.885,-1.981 26.285,-5.381 26.285,-18.546 22.445,-22.385 22.445,-22.826 22.892,-23.272 U2.14
  Bottom Layer w0.25: v1(17.217,8.363) 17.217,8.843 16.967,9.093 16.734,9.093 15.871,8.23 15.871,6.709 17.562,5.018 17.562,2.599 17.78,2.381 v1(17.78,2.286)
VBUSA: D1.2 D4.2 J2.A4 J2.A9 J2.B4 J2.B9 R12.1 | length 32.5
  Top Layer w0.25: R12.1 31.939,-1.247 35.472,2.286 D4.2 ; J2.A4 40.366,-5.06 40.604,-5.298 41.316,-5.298 J2.B9 ; J2.A9 40.366,-2.56 40.604,-2.798 41.316,-2.798 J2.B4 41.926,-2.81 41.929,-2.813
  Top Layer w0.6: 41.929,-2.813 42.319,-2.423 43.354,-2.423 43.741,-2.81 44.775,-2.81 ; 41.932,-5.31 42.12,-5.31 42.623,-5.813 43.916,-5.813 44.802,-4.927 D1.2 ; D4.2 D1.2@44.785,2.286
VBUSB: D7.2 D10.2 J3.A4 J3.A9 J3.B4 J3.B9 | length 19.2
  Top Layer w0.25: J3.A9 16.124,5.212 16.362,5.45 16.362,6.163 J3.B4 ; J3.A4 18.624,5.212 18.862,5.45 18.862,6.163 J3.B9
  Top Layer w0.6: 16.374,6.778 16.374,6.966 15.871,7.469 15.871,8.762 16.757,9.649 D7.2 23.935,9.631 23.935,7.583 D10.2 ; 18.874,6.778 18.874,9.622
pads on no net: J2.A2 J2.A3 J2.A8 J2.A10 J2.A11 J2.B2 J2.B3 J2.B8 J2.B10 J2.B11 J2.MH1 J2.MH2 J3.A2 J3.A3 J3.A8 J3.A10 J3.A11 J3.B2 J3.B3 J3.B8 J3.B10 J3.B11 J3.MH1 J3.MH2 SW1.3 SW1.4 SW1.5 SW1.6 SW1.7 SW1.8 U1.4 U2.22 U3.1 U3.2 U3.6 U3.7 U3.10 U3.12 U3.13 U3.14 U3.15 U3.16 U3.17 U3.18 U3.19 U3.20 U3.21 U3.22 U3.23 U3.27

## Polygon pours and split planes (outlines as drawn)
GND on Top Layer "GND_L01_P001" (solid, remove dead copper, pour order 1): -4.877,16.662 -4.877,-42.926 58.318,-42.926 58.674,-42.57 57.658,-41.554 57.658,14.529 55.372,16.815 -5.029,16.815
GND on Bottom Layer "GND_L02_P000" (solid, remove dead copper, pour order 0): -4.877,16.662 -4.877,-42.926 58.318,-42.926 58.674,-42.57 57.658,-41.554 57.658,14.529 55.372,16.815 -5.029,16.815

## Keep-outs
Keep-Out Layer:
  the board outline again, w0.254

## Other copper
Top Layer:
  pour cut-out: 2.083,-2.083 -2.083,-2.083 -2.083,1.778 2.083,1.778

## Silkscreen, mask and mechanical layers (free items; w line width, h text height)
Top Overlay:
  text "3V3" at 42.216,8.039 h1.5
  text "Fid." at -1.37,1.947 h2
  text "GND" at 41.148,-16.752 h1.5
  text "TxD" at 41.149,-19.304 h1.5
  text "RxD" at 41.149,-21.844 h1.5
  text "3V3" at 41.149,-24.372 h1.5
  text "5V" at 41.148,-26.912 h1.5
Bottom Overlay:
  circle w0.254: c46.822,-34.913 r1.8
  circle w0.254: c3.822,-34.913 r1.8
  circle w0.254: c3.822,8.087 r1.8
  circle w0.254: c46.822,8.087 r1.8
Mechanical 1:
  circle w0.254: c3.822,8.087 r1.25
  circle w0.254: c46.822,8.087 r1.25
  circle w0.254: c46.822,-34.913 r1.25
  circle w0.254: c42.822,-34.913 r0.808
  circle w0.254: c7.822,-34.913 r0.807
  circle w0.254: c3.822,-34.913 r1.25
  lines w0.254: -2.178,-34.913 ccw(c3.822,-34.913) 3.822,-40.913 22.822,-40.913 22.822,-39.313 27.822,-39.313 27.822,-40.913 46.822,-40.913 ccw(c46.822,-34.913) 52.822,-34.913 52.822,-28.713 48.972,-28.713 48.972,3.787 52.822,3.787 52.822,8.087 ccw(c46.822,8.087) 46.822,14.087 39.322,14.087 39.322,12.725 23.622,12.725 23.622,14.087 3.822,14.087 ccw(c3.822,8.087) -2.178,8.087 -2.178,-2.213 5.482,-2.213 5.482,-28.553 -2.178,-28.613 -2.178,-34.913
Mechanical 3:
  lines w0.013: 21.322,-36.913 21.322,-35.913 ; 21.322,-36.913 23.322,-36.913 ; 21.322,-36.913 21.322,-35.913 ; 21.322,-36.913 21.322,-35.913 ; 21.322,-36.913 23.322,-36.913 ; 21.322,-36.913 23.322,-36.913 ; 21.322,-36.913 21.322,-35.913 ; 21.322,-36.913 23.322,-36.913 ; 21.322,-35.913 23.322,-35.913 ; 21.322,-35.913 23.322,-35.913 ; 21.322,-35.913 23.322,-35.913 ; 21.322,-35.913 23.322,-35.913 ; 23.322,-36.913 23.322,-35.913 ; 23.322,-36.913 23.322,-35.913 ; 23.322,-36.913 23.322,-35.913 ; 23.322,-36.913 23.322,-35.913 ; 27.322,-36.913 27.322,-35.913 ; 27.322,-36.913 29.322,-36.913 ; 27.322,-36.913 29.322,-36.913 ; 27.322,-36.913 27.322,-35.913 ; 27.322,-36.913 29.322,-36.913 ; 27.322,-36.913 29.322,-36.913 ; 27.322,-36.913 27.322,-35.913 ; 27.322,-36.913 27.322,-35.913 ; 27.322,-35.913 29.322,-35.913 ; 27.322,-35.913 29.322,-35.913 ; 27.322,-35.913 29.322,-35.913 ; 27.322,-35.913 29.322,-35.913 ; 29.322,-36.913 29.322,-35.913 ; 29.322,-36.913 29.322,-35.913 ; 29.322,-36.913 29.322,-35.913 ; 29.322,-36.913 29.322,-35.913